# Altium PCB Pocket_Organ_V19_2021-09-19.pcbdoc (part 1 of 3)
Units mil, origin at the board's own origin, x right, y up, seen from the top; angles counter-clockwise.
Board outline 7303.06 x 4993.89 mil, 2 copper layers (Top Layer, Bottom Layer); 194 components, 271 nets, 792 pads, 208 vias.
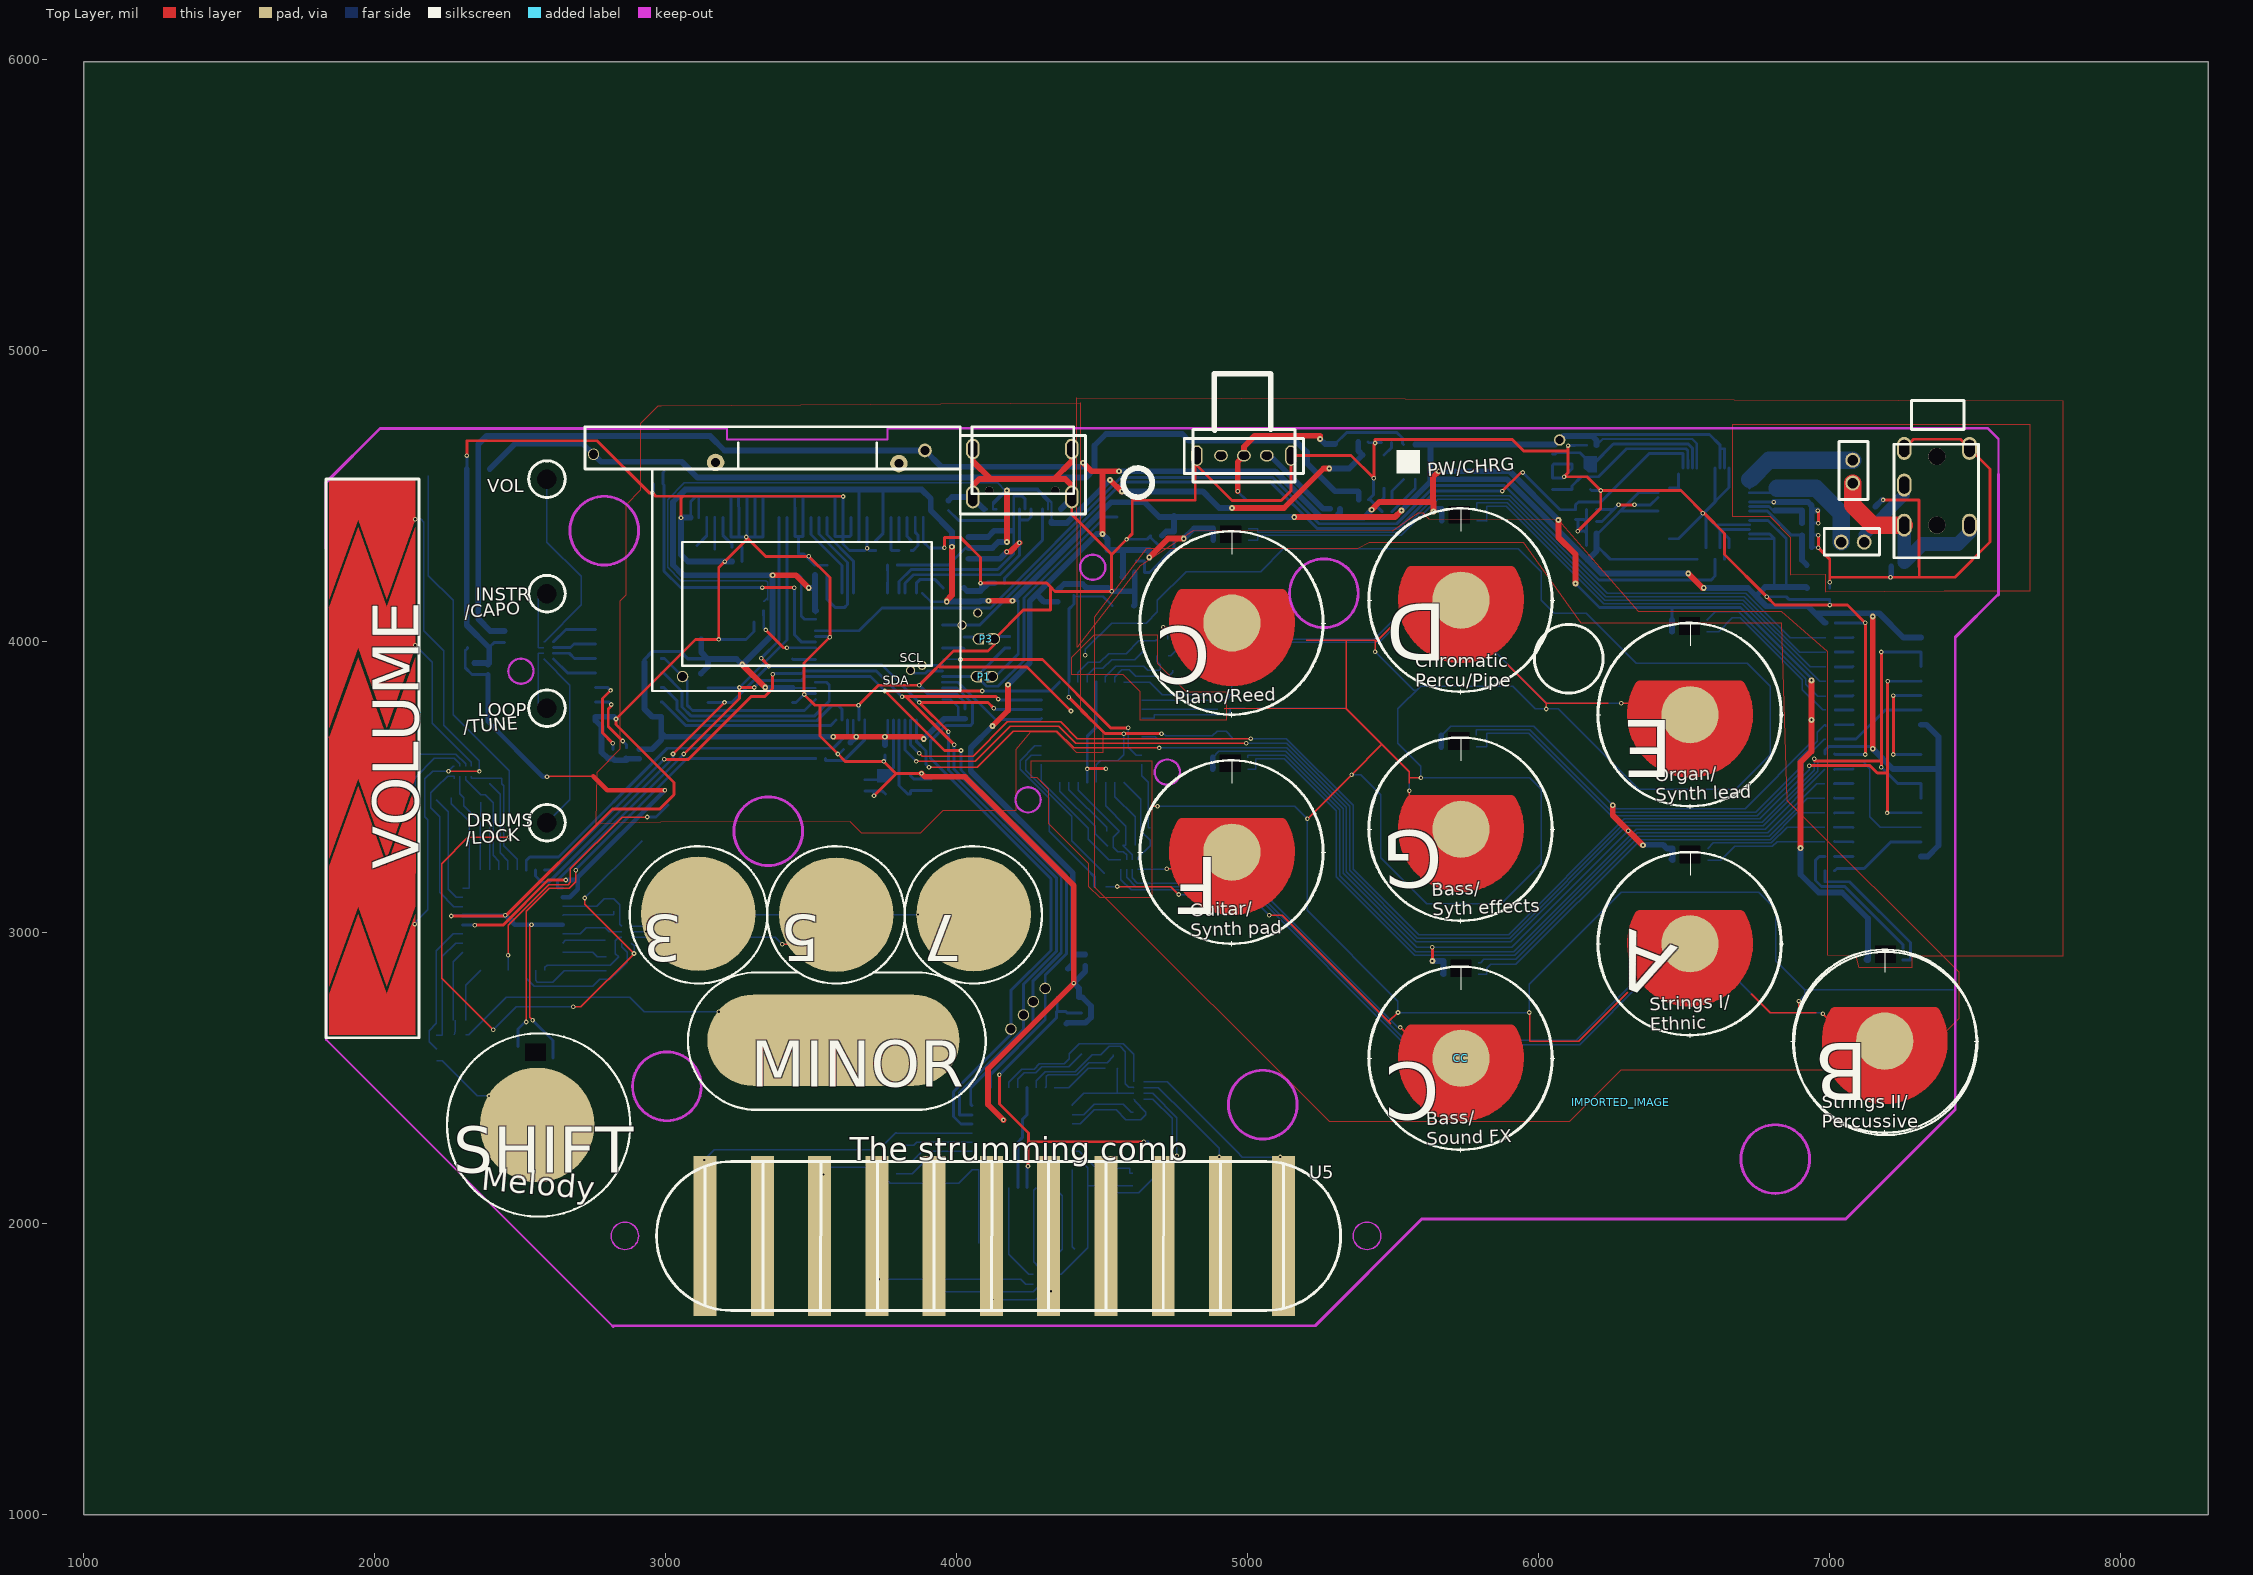
[diagram p0: Top Layer view]
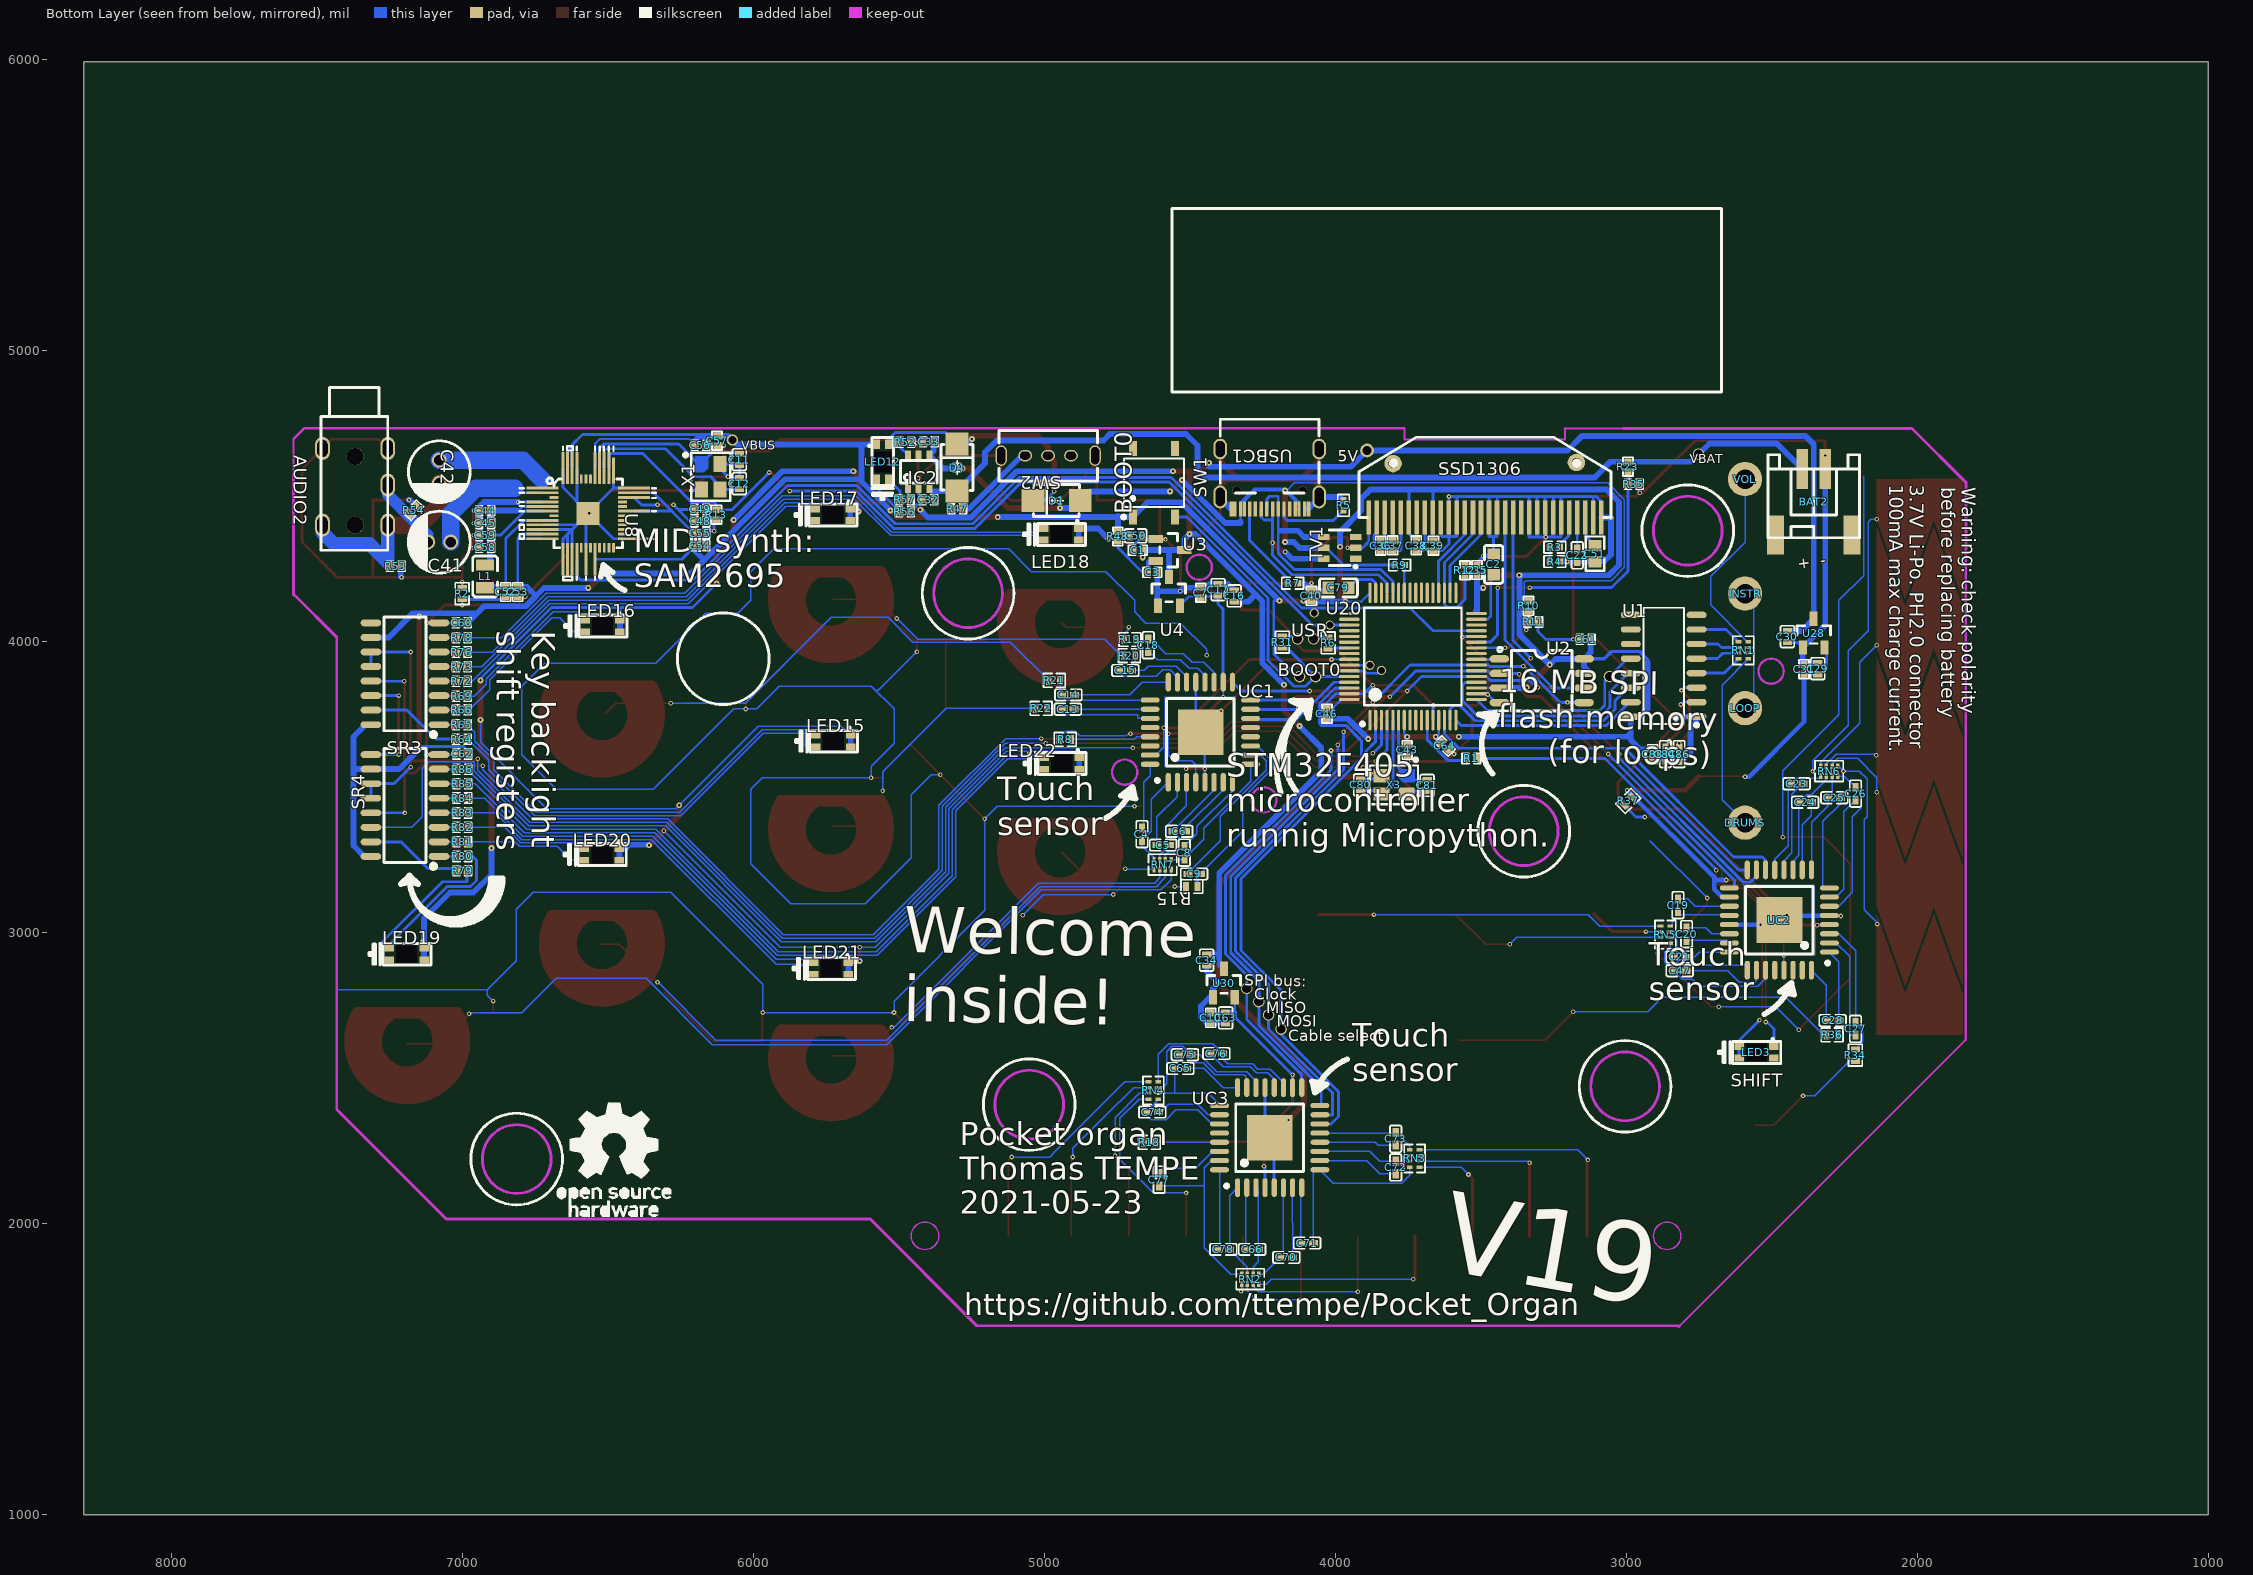
[diagram p1: Bottom Layer view, seen from below]

## Layer stack, top to bottom
Top Layer: signal copper (thickness not stored)
Dielectric: dielectric 12.6, FR-4, Dk 4.8
Bottom Layer: signal copper (thickness not stored)

## Board outline
8303.06,1000 1000,1000 1000,5993.89 8303.06,5993.89

## Components (designator, comment, footprint, x,y, rotation, side; value= is the part's Value field where it differs from the comment)
3 "CAPACITIVE_PAD" CAPACITIVE_PAD_ROUND 3112.2,3065.08 r0 top
5 "CAPACITIVE_PAD" CAPACITIVE_PAD_ROUND 3586.61,3062.22 r0 top
7 "CAPACITIVE_PAD" CAPACITIVE_PAD_ROUND 4059.05,3063.11 r0 top
A "CAPACITIVE_PAD" PAD_11MM_CUT-OFF 6521.65,2961.82 r0 top
AUDIO2 "PJ-313D_C319112" PHONE-JACK-5P-6.0X12.5-H5.0 7370.07,4532.69 r90 bottom
B "CAPACITIVE_PAD" PAD_11MM_CUT-OFF 7190.94,2627.18 r0 top
BAT2 "A2001WR-S-2P" A2001WR-S-2P 2356.29,4480.44 r180 bottom
C "CAPACITIVE_PAD" PAD_11MM_CUT-OFF 4946.84,4064.18 r0 top
C1 "1u" 0402 4679.13,4315.08 r0 bottom
C2 "2.2uF" C0603 3456.69,4265.87 r270 bottom
C3 "1u" 0402 4629.91,4238.31 r180 bottom
C4 "4.7nF" C0402#1 4665.36,3338.47 r90 bottom
C5 "4.7nF" C0402#1 4592.46,3301.07 r0 bottom
C6 "4.7nF" C0402#1 4537.36,3348.37 r180 bottom
C7 "100n" 0402 4463.06,4168.89 r270 bottom
C8 "4.7nF" C0402#1 4519.66,3275.47 r90 bottom
C9 "4.7nF" C0402#1 4486.22,3201.98 r180 bottom
C10 "100n" 0402 4429.13,2706.82 r90 bottom
C11 "20pF" C0402#2 6049.21,4626.11 r270 bottom
C12 "20pF" C0402#2 6049.21,4543.43 r90 bottom
C13 "4.7nF" C0402#1 4920.36,3768.27 r0 bottom
C14 "4.7nF" C0402#1 4918.46,3817.47 r0 bottom
C15 "4.7nF" C0402#1 4722.46,3901.47 r180 bottom
C16 "1uF" C0402#2 4348.42,4157.39 r90 bottom
C17 "1uF" C0402#2 4403.53,4179.05 r90 bottom
C18 "4.7nF" C0402#1 4643.66,3988.07 r90 bottom
C19 "4.7nF" C0402#1 2822.86,3094.37 r90 bottom
C20 "4.7nF" C0402#1 2793.31,2995.29 r90 bottom
C21 "4.7nF" C0402#1 2816.93,2916.55 r0 bottom
C22 "4.7uF" C0402#1 3169.26,4297.17 r270 bottom
C23 "4.7nF" C0402#1 2415.36,3511.77 r180 bottom
C24 "4.7nF" C0402#1 2385.86,3448.07 r180 bottom
C25 "4.7nF" C0402#1 2285.46,3463.77 r180 bottom
C26 "4.7nF" C0402#1 2212.56,3478.27 r270 bottom
C27 "4.7nF" C0402#1 2212.56,2669.17 r270 bottom
C28 "4.7nF" C0402#1 2291.36,2698.27 r0 bottom
C29 "1uF" C0402#2 2342.51,3907.39 r90 bottom
C30 "1uF" C0402#2 2446.84,4017.63 r270 bottom
C31 "100n" 0402 2389.76,3905.42 r90 bottom
C32 "10u" 0402 5399.6,4488.27 r180 bottom
C33 "100n" 0402 5397.63,4687.13 r180 bottom
C34 "1uF" C0402#2 4442.91,2905.64 r270 bottom
C35 "100n" 0402 3513.77,4246.18 r90 bottom
C36 "1u" 0402 3844.48,4330.83 r270 bottom
C37 "1u" 0402 3803.14,4330.83 r90 bottom
C38 "1u" 0402 3722.44,4330.83 r90 bottom
C39 "1u" 0402 3663.38,4330.62 r270 bottom
C40 "100n" 0402 4082.67,4157.6 r90 bottom
C41 "100uF" CAP_5X5.4 7080.7,4342.64 r0 bottom
C42 "100uF" CAP_5X5.4 7080.7,4584.77 r270 bottom
C43 "100n" 0402 3753.93,3628.07 r270 bottom
C44 "100n" 0402 6923.23,4450.91 r180 bottom
C45 "10u" 0402 6923.22,4407.6 r180 bottom
C46 "100n" 0402 4029.52,3752.09 r90 bottom
C47 "4.7nF" C0402#1 2816.93,2869.3 r0 bottom
C48 "4.7u" 0402 6183.06,4413.51 r0 bottom
C49 "100n" 0402 6183.06,4454.84 r0 bottom
C50 "4.7uF" C0402#2 4687,4364.29 r180 bottom
C51 "2.2u" 0603 3108.26,4303.06 r90 bottom
C52 "100n" 0402 6852.35,4171.38 r270 bottom
C53 "100n" 0402 6811.01,4171.38 r270 bottom
C54 "100n" 0402 6183.06,4330.83 r180 bottom
C55 "100n" 0402 6183.06,4372.17 r180 bottom
C56 "10u" 0402 6183.06,4675.32 r180 bottom
C57 "100n" 0402 6125.97,4691.06 r270 bottom
C58 "100n" 0402 6923.22,4324.92 r180 bottom
C59 "10u" 0402 6923.22,4366.26 r180 bottom
C60 "100n" 0402 7003.93,4065.08 r180 bottom
C61 "100n" 0402 3139.76,4007.99 r0 bottom
C62 "100n" 0402 7001.96,3614.3 r180 bottom
C63 "1uF" C0402#2 4377.95,2706.82 r270 bottom
C64 "100n" 0402 3624.01,3641.85 r225 bottom
C65 "4.7nF" C0402#1 4533.46,2533.37 r0 bottom
C66 "4.7nF" C0402#1 4286.46,1911.37 r0 bottom
C70 "4.7nF" C0402#1 4169.26,1883.77 r180 bottom
C71 "4.7nF" C0402#1 4097.46,1933.07 r180 bottom
C72 "4.7nF" C0402#1 3793.26,2192.87 r90 bottom
C73 "4.7nF" C0402#1 3793.26,2291.27 r90 bottom
C74 "4.7nF" C0402#1 4629.92,2383.09 r180 bottom
C75 "4.7nF" C0402#1 4517.66,2580.67 r180 bottom
C76 "4.7nF" C0402#1 4409.46,2584.57 r180 bottom
C77 "4.7nF" C0402#1 4606.29,2150.8 r90 bottom
C78 "4.7nF" C0402#1 4385.86,1911.37 r0 bottom
C79 "2.2uF" C0603 3990.15,4185.16 r0 bottom
C80 "10pF" C0402#2 3913.38,3508 r270 bottom
C81 "10pF" C0402#2 3685.03,3506.03 r270 bottom
C83 "100n" 0402 2909.44,3614.09 r270 bottom
C84 "4.7nF" C0402#1 2866.16,3614.07 r270 bottom
C86 "100pF" C0402#1 2818.86,3614.07 r270 bottom
CC "CAPACITIVE_PAD" PAD_11MM_CUT-OFF 5734.25,2568.12 r0 top
D "CAPACITIVE_PAD" PAD_11MM_CUT-OFF 5734.25,4142.92 r0 top
D1 "SS14" SMA_L4.3-W2.6-LS5.2-FD 4958.66,4485.44 r180 bottom
D4 "SS14" SMA_L4.3-W2.6-LS5.2-FD 5301.17,4598.51 r270 bottom
DRUMS "CAPACITIVE_PAD" T1147-1_PIN 2592.46,3378.07 r0 top
E "CAPACITIVE_PAD" PAD_11MM_CUT-OFF 6521.65,3749.22 r0 top
F "CAPACITIVE_PAD" PAD_11MM_CUT-OFF 4946.84,3276.78 r0 top
G "CAPACITIVE_PAD" PAD_11MM_CUT-OFF 5734.25,3355.52 r0 top
IC2 "TP4057" SOT-23-6 5433.06,4584.73 r0 bottom
IMPORTED_IMAGE "IMPORTED_IMAGE" IMPORTED_IMAGE 6283.06,2416.65 r0 top
INSTR "CAPACITIVE_PAD" T1147-1_PIN 2592.46,4165.47 r0 top
L1 "600Ω" L0805 6923.22,4224.53 r270 bottom
LED3 "SHIFT" LED-SMD_4PIN-L3.2-W1.25-H1.1-TR-TEMPE 2553.06,2588.89 r0 bottom
LED12 "PW/CHRG" LED-SMD_4PIN-L3.2-W1.25-H1.1-TR-TEMPE 5557.08,4618.19 r270 bottom
LED15 "Reverse bicolor LED" LED-SMD_4PIN-L3.2-W1.25-H1.1-TR-TEMPE 5726.37,3658.67 r0 bottom
LED16 "Reverse bicolor LED" LED-SMD_4PIN-L3.2-W1.25-H1.1-TR-TEMPE 6519.68,4054.34 r0 bottom
LED17 "Reverse bicolor LED" LED-SMD_4PIN-L3.2-W1.25-H1.1-TR-TEMPE 5728.34,4436.23 r0 bottom
LED18 "Reverse bicolor LED" LED-SMD_4PIN-L3.2-W1.25-H1.1-TR-TEMPE 4942.91,4369.3 r0 bottom
LED19 "Reverse bicolor LED" LED-SMD_4PIN-L3.2-W1.25-H1.1-TR-TEMPE 7192.9,2926.39 r0 bottom
LED20 "Reverse bicolor LED" LED-SMD_4PIN-L3.2-W1.25-H1.1-TR-TEMPE 6521.64,3268.91 r0 bottom
LED21 "Reverse bicolor LED" LED-SMD_4PIN-L3.2-W1.25-H1.1-TR-TEMPE 5734.24,2877.18 r0 bottom
LED22 "Reverse bicolor LED" LED-SMD_4PIN-L3.2-W1.25-H1.1-TR-TEMPE 4940.94,3581.9 r0 bottom
LOOP "CAPACITIVE_PAD" T1147-1_PIN 2592.46,3771.77 r0 top
MINOR "CAPACITIVE_PAD" CAPACITIVE_PAD_OVAL_22_8 3576.76,2630.04 r0 top
P1 "BOOT0" JUMPER 4098.42,3880.04 r0 bottom
P3 "USR" JUMPER 4100.39,4009.96 r180 bottom
R1 "1k" 0402 3533.06,3598.89 r0 bottom
R2 "0" R0402#1 7001.96,4165.48 r270 bottom
R3 "200K" R0402#2 3246.06,4324.97 r0 bottom
R4 "200K" R0402#2 3246.06,4275.67 r180 bottom
R5 "5.1K" R0402#2 3972.46,4468.67 r270 bottom
R6 "4.7K" R0402#1 4025.58,3995.97 r270 bottom
R7 "5.1K" R0402#2 4147.66,4200.87 r180 bottom
R8 "100K" R0402#1 4929.13,3664.58 r180 bottom
R9 "510" R0402#2 3779.56,4263.67 r0 bottom
R10 "47k" 0402 3336.61,4123.24 r90 bottom
R11 "47k" 0402 3320.86,4068.12 r180 bottom
R12 "47k" 0402 3555.11,4246.18 r270 bottom
R13 "47k" 0402 6127.94,4437.13 r270 bottom
R15 "4.7K" R0402#1 4494.09,3158.67 r180 bottom
R18 "100K" R0402#1 4639.75,2279.44 r180 bottom
R19 "4.7K" R0402#1 4706.68,4007.79 r0 bottom
R20 "4.7K" R0402#1 4708.65,3952.67 r0 bottom
R21 "4.7K" R0402#1 4966.53,3867.33 r0 bottom
R22 "4.7K" R0402#1 5011.81,3770.88 r0 bottom
R23 "47k" 0402 2994.8,4601.77 r90 bottom
R31 "10K" R0402#1 4183.06,3998.89 r270 bottom
R34 "4.7K" R0402#1 2213.06,2578.89 r270 bottom
R35 "47k" 0402 2974.8,4541.77 r180 bottom
R36 "4.7K" R0402#1 2293.06,2648.89 r0 bottom
R37 "100K" R0402#1 2994.09,3452.67 r315 bottom
R47 "1" 0402 5301.17,4456.77 r180 bottom
R48 "1" 0402 4748.02,4362.32 r270 bottom
R52 "10k" 0402 5478.34,4685.16 r0 bottom
R53 "47k" 0402 7230.31,4259.07 r180 bottom
R54 "47k" 0402 7169.28,4451.98 r132 bottom
R56 "220" 0402 5480.3,4446.93 r0 bottom
R57 "2k" 0402 5480.3,4488.27 r0 bottom
R64 "220" 0402 7003.93,3665.48 r180 bottom
R65 "220" 0402 7003.93,3714.69 r180 bottom
R66 "220" 0402 7003.92,3765.87 r180 bottom
R69 "220" 0402 7003.93,3813.11 r180 bottom
R72 "220" 0402 7003.92,3864.29 r180 bottom
R73 "220" 0402 7003.93,3913.51 r180 bottom
R76 "220" 0402 7003.93,3964.69 r180 bottom
R78 "220" 0402 7003.92,4013.9 r180 bottom
R79 "220" 0402 7001.95,3212.72 r180 bottom
R80 "220" 0402 7001.95,3261.93 r180 bottom
R81 "220" 0402 7001.95,3313.12 r180 bottom
R82 "220" 0402 7001.95,3362.33 r180 bottom
R83 "220" 0402 7001.95,3411.54 r180 bottom
R84 "220" 0402 7001.95,3462.72 r180 bottom
R85 "220" 0402 7001.95,3511.93 r180 bottom
R86 "220" 0402 7001.95,3561.15 r180 bottom
RN1 "1K" RES-ARRAY-SMD_0402-8P-L2.0-W1.0-BL 2598.46,3970.37 r90 bottom
RN2 "10k" RES-ARRAY-SMD_0402-8P-L2.0-W1.0-BL 4293.06,1808.87 r180 bottom
RN3 "10k" RES-ARRAY-SMD_0402-8P-L2.0-W1.0-BL 3728.16,2223.77 r90 bottom
RN4 "10k" RES-ARRAY-SMD_0402-8P-L2.0-W1.0-BL 4626.36,2457.67 r270 bottom
RN5 "10k" RES-ARRAY-SMD_0402-8P-L2.0-W1.0-BL 2866.14,2993.32 r90 bottom
RN6 "10k" RES-ARRAY-SMD_0402-8P-L2.0-W1.0-BL 2303.16,3555.07 r0 bottom
RN7 "10k" RES-ARRAY-SMD_0402-8P-L2.0-W1.0-BL 4594.46,3234.17 r180 bottom
SHIFT "CAPACITIVE_PAD" CAPACITIVE_PAD_ROUND 2559,2338.85 r0 top
SR3 "74HC595A" SOIC-16_150MIL 7198.81,3889.89 r270 bottom
SR4 "74HC595A" SOIC-16_150MIL 7198.81,3437.13 r270 bottom
SSD1306 "SSD1306-128x64-OLED-SPI" "SSD1306-30PIN-POT REVERSED" 3486.26,4427.27 r0 bottom
SW1 "TS-1187A-B-A-B" SW-SMD_4P-L5.1-W5.1-P3.70-LS6.5-2 4624.01,4546.47 r270 bottom
SW2 "SK-12D02-VG3" SW-TH_SK-12D02VG3 4988.15,4639.87 r180 bottom
TV1 "SRV05-4-P-T7" SOT-23-6_L2.9-W1.6-P0.95-LS2.8-BR 3986.17,4322.76 r0 bottom
U1 "XW06A" SOP-16_L10.0-W3.9-P1.27-LS6.0-BL 2872.06,3917.27 r270 bottom
U2 "W25Q128JVSIQTR" SOIC-8_L5.3-W5.3-P1.27-LS8.0-BL 3291.33,3866.05 r90 bottom
U3 "XC6206P332MR" SOT-23-3_L2.9-W1.6-P1.90-LS2.8-BR 4568.89,4315.08 r180 bottom
U4 "XC6206P332MR" SOT-23-3_L2.9-W1.6-P1.90-LS2.8-BR 4572.83,4173.35 r90 bottom
U5 "Strumming_comb_11" STRUMMING_COMB_11 3943.06,1858.89 r0 top
U8 "SAM2695" QFN48G-0.4-6X6MM 6568.89,4441.06 r90 bottom
U20 "STM32F405RGT6" LQFP-64_L10.0-W10.0-P0.50-LS12.0-TL 3734.07,3949.38 r270 bottom
U28 "XC6206P332MR" SOT-23-3_L2.9-W1.6-P1.90-LS2.8-BR 2356.29,4029.44 r90 bottom
U30 "XC6206P332MR" SOT-23-3_L2.9-W1.6-P1.90-LS2.8-BR 4383.85,2826.89 r90 bottom
UC1 "AT42QT1110-AUR" TQFP-32_L7.0-W7.0-P0.80-LS9.0-BL 4464.56,3689.07 r0 bottom
UC2 "AT42QT1110-AUR" TQFP-32_L7.0-W7.0-P0.80-LS9.0-BL 2474.36,3043.47 r270 bottom
UC3 "AT42QT1110-AUR" TQFP-32_L7.0-W7.0-P0.80-LS9.0-BL 4226.36,2295.37 r0 bottom
USBC1 "TYPE-C-31-M-12" USB-C_SMD-TYPE-C-31-M-12 4226.37,4559.18 r180 bottom
VOL "CAPACITIVE_PAD" T1147-1_PIN 2592.46,4559.17 r0 top
VOLUME "Slide Key 4 pads" SLIDER_4 2139.76,3673.37 r90 top
X1 "12MHz" OSC-SMD_4P-L3.2-W2.5-BL 6147.64,4567.05 r90 bottom
X3 "12MHz" OSC-SMD_4P-L3.2-W2.5-BL 3799.2,3508 r180 bottom

## Footprints (in the part's own frame and the unit in brackets; to place one, negate y for a bottom-side part, rotate by r counter-clockwise, add the part's x,y. Pads: shape width x height; smd on the part's side, far side on the other; paste and mask are expansions set on the pad)
0402 [mm]
  rect 0.6x0.65 smd: 1(0.424,0) 2(-0.424,0)
  silkscreen extent -0.81,-0.43 0.82,0.43
0603 [mm]
  rect 1x1.1 smd: 1(0.7,0) 2(-0.7,0)
  silkscreen extent -1.5,-0.8 1.5,0.8
A2001WR-S-2P [mm]
  rect 1x3.5 smd: 1(-1,2.875) 2(1,2.875)
  rect 1.5x3.4 smd: 4(-3.349,-2.875) 5(3.349,-2.875)
  silkscreen extent -4,-3.13 4,4.12
C0402#1 [mm]
  rect 0.79x0.54 smd: 1(0.545,0) 2(-0.545,0)
  silkscreen extent -1.17,-0.5 1.17,0.5
C0402#2 [mm]
  rect 0.5x0.8 smd: 1(0.5,0) 2(-0.5,0)
  silkscreen extent -0.95,-0.6 0.95,0.6
C0603 [mm]
  rect 1x1.1 smd: 1(0.9,0) 2(-0.9,0)
  silkscreen extent -1.65,-0.8 1.65,0.8
CAP_5X5.4 [mm]
  round 1.3 hole 0.914: 1(-1,0) 2(1,0)
  silkscreen extent -2.7,-2.7 2.7,2.7
CAPACITIVE_PAD_OVAL_22_8 [mm]
  oval 22x8 smd: 1(0,0)
CAPACITIVE_PAD_ROUND [mm]
  round 10 smd: 1(0,0)
IMPORTED_IMAGE [mil]
JUMPER [mm]
  rect 0.5x1 smd far side: 1(0.381,0) 2(-0.508,0)
  round 1 hole 0.8: 1(0.635,0) 2(-0.762,0)
L0805 [mm]
  rect 1x1.55 smd: 1(1,0) 2(-1,0)
  silkscreen extent -1.78,-1.08 1.78,1.08
LED-SMD_4PIN-L3.2-W1.25-H1.1-TR-TEMPE [mil]
  rect 32.68x23.62 smd: 1(-60,-20) 2(60,-20) 3(-60,20) 4(60,20)
  Multi-Layer board cut-out: 35.43,-29.53 35.43,29.53 -35.43,29.53 -35.43,-29.53
  silkscreen extent -84,-48 130,38
LQFP-64_L10.0-W10.0-P0.50-LS12.0-TL [mm]
  oval 1.8x0.28 smd: 1(5.55,-3.75) 2(5.55,-3.25) 3(5.55,-2.75) 4(5.55,-2.25) 5(5.55,-1.75) 6(5.55,-1.25) 7(5.55,-0.75) 8(5.55,-0.25) 9(5.55,0.25) 10(5.55,0.75) 11(5.55,1.25) 12(5.55,1.75) 13(5.55,2.25) 14(5.55,2.75) 15(5.55,3.25) 16(5.55,3.75) 33(-5.55,3.75) 34(-5.55,3.25) 35(-5.55,2.75) 36(-5.55,2.25) 37(-5.55,1.75) 38(-5.55,1.25) 39(-5.55,0.75) 40(-5.55,0.25) 41(-5.55,-0.25) 42(-5.55,-0.75) 43(-5.55,-1.25) 44(-5.55,-1.75) 45(-5.55,-2.25) 46(-5.55,-2.75) 47(-5.55,-3.25) 48(-5.55,-3.75)
  oval 0.28x1.8 smd: 17(3.75,5.55) 18(3.25,5.55) 19(2.75,5.55) 20(2.25,5.55) 21(1.75,5.55) 22(1.25,5.55) 23(0.75,5.55) 24(0.25,5.55) 25(-0.25,5.55) 26(-0.75,5.55) 27(-1.25,5.55) 28(-1.75,5.55) 29(-2.25,5.55) 30(-2.75,5.55) 31(-3.25,5.55) 32(-3.75,5.55) 49(-3.75,-5.55) 50(-3.25,-5.55) 51(-2.75,-5.55) 52(-2.25,-5.55) 53(-1.75,-5.55) 54(-1.25,-5.55) 55(-0.75,-5.55) 56(-0.25,-5.55) 57(0.25,-5.55) 58(0.75,-5.55) 59(1.25,-5.55) 60(1.75,-5.55) 61(2.25,-5.55) 62(2.75,-5.55) 63(3.25,-5.55) 64(3.75,-5.55)
  silkscreen extent -4.25,-4.55 6.05,4.25
OSC-SMD_4P-L3.2-W2.5-BL [mm]
  round 0 smd: 1(1.1,0.8)
  rect 1.4x1.15 smd: 2(-1.1,0.8) 3(-1.1,-0.8) 4(1.1,-0.8)
  Top Layer region: 1.8,0.225 0.762,0.225 0.4,0.604 0.4,1.375 1.8,1.375
  silkscreen extent -2.1,-1.7 2.1,2.35
PAD_11MM_CUT-OFF [mm]
  round 5 smd: 1(0,0)
  Top Layer lines w1: -3.523,2.416 ccw(c0,0) 3.594,2.309 ; -2.654,2.229 ccw(c0,0) 2.562,2.334 ; -1.116,2.47 ccw(c0,0) 1.589,2.196 ; -4.347,2.47 4.347,2.47 cw(c0,0) -4.347,2.47
  silkscreen extent -8.2,-8.2 8.2,8
PHONE-JACK-5P-6.0X12.5-H5.0 [mm]
  oval 2x1.3 hole 0.9 slot 1.5 at 0 deg: 1(3.35,-2.85) 1(3.35,2.85) 2(0.15,-2.85) 3(-3.35,-2.85) 3(-3.35,2.85)
  round 1.5 hole 1.5 unplated: ""(-3.35,0) ""(2.65,0)
  silkscreen extent -5.54,-2.85 8.68,2.99
QFN48G-0.4-6X6MM [mil]
  rect 10x110.24 smd: 1(87,157.48) 2(71,157.48) 4(39,157.48) 5(24,157.48) 6(8,157.48) 8(-24,157.48) 9(-39,157.48) 10(-55,157.48) 11(-71,157.48) 12(-87,157.48) 25(-87,-157.36) 31(8,-157.36) 34(55,-157.36) 35(71,-157.36) 36(87,-157.36)
  rect 9.84x31.5 smd: 3(55,118) 7(-8,118) 26(-71,-118) 27(-55,-118) 28(-39,-118) 29(-24,-118) 30(-8,-118) 32(24,-118) 33(39,-118)
  rect 110.24x10 smd: 13(-157.48,87) 14(-157.48,71) 15(-157.48,55) 16(-157.48,39) 18(-157.48,8) 20(-157.48,-24) 38(155.51,-71) 39(155.51,-55) 40(155.51,-39) 41(155.51,-24) 45(155.51,39) 46(155.51,55) 47(155.51,71) 48(155.51,87)
  rect 31.5x9.84 smd: 17(-118,24) 19(-118,-8) 21(-118,-39) 22(-118,-55) 23(-118,-71) 24(-118,-87) 42(118,-8) 43(118,8) 44(118,24)
  rect 90.55x10 smd: 37(147.64,-87)
  rect 78.74x78.74 smd: PAD(0,0)
  silkscreen extent -118,-118 122,142
R0402#1 [mm]
  rect 0.5x0.8 smd: 1(0.5,0) 2(-0.5,0)
  silkscreen extent -0.95,-0.6 0.95,0.6
R0402#2 [mm]
  rect 0.566x0.54 smd: 1(0.433,0) 2(-0.433,0)
  silkscreen extent -0.94,-0.5 0.94,0.5
RES-ARRAY-SMD_0402-8P-L2.0-W1.0-BL [mm]
  rect 0.3x0.505 smd: 1(0.75,-0.427) 2(0.25,-0.427) 3(-0.25,-0.427) 4(-0.75,-0.427) 5(-0.75,0.428) 6(-0.25,0.428) 7(0.25,0.428) 8(0.75,0.428)
  silkscreen extent -1.23,-0.91 1.23,0.91
SLIDER_4 [mm]
  round 0 smd: 1(-26,0) 1(22.5,7.5) 2(-11.3,7.5) 3(-0.1,7.5) 4(11.3,7.5)
  Top Layer region: -26,0 -15.5,0 -22.5,2.5 -15.5,5 -22.5,7.5 -26,7.5
  Top Layer region: 22.5,7.5 12,7.5 19,5 12,2.5 19,0 22.5,0
  Top Layer region: -11.3,7.5 -21.8,7.5 -14.8,5 -21.8,2.5 -14.8,0 -4.3,0 -11.3,2.5 -4.3,5
  Top Layer region: -0.1,7.5 -10.6,7.5 -3.6,5 -10.6,2.5 -3.6,0 6.9,0 -0.1,2.5 6.9,5
  Top Layer region: 11.3,7.5 0.8,7.5 7.8,5 0.8,2.5 7.8,0 18.3,0 11.3,2.5 18.3,5
SMA_L4.3-W2.6-LS5.2-FD [mm]
  rect 2x2 smd: 1(2.057,0) 2(-2.057,0)
  silkscreen extent -2.03,-1.4 2.01,1.4
SOIC-8_L5.3-W5.3-P1.27-LS8.0-BL [mm]
  oval 0.65x1.7 smd: 1(1.905,3.7) 2(0.635,3.7) 3(-0.635,3.7) 4(-1.905,3.7) 5(-1.905,-3.7) 6(-0.635,-3.7) 7(0.635,-3.7) 8(1.905,-3.7)
  silkscreen extent -2.63,-2.64 2.92,3.84
SOIC-16_150MIL [mm]
  oval 0.6x1.8 smd: 1(4.445,2.972) 2(3.175,2.972) 3(1.905,2.972) 4(0.635,2.972) 5(-0.635,2.972) 6(-1.905,2.972) 7(-3.175,2.972) 8(-4.445,2.972) 9(-4.445,-2.972) 10(-3.175,-2.972) 11(-1.905,-2.972) 12(-0.635,-2.972) 13(0.635,-2.972) 14(1.905,-2.972) 15(3.175,-2.972) 16(4.445,-2.972)
  silkscreen extent -4.98,-1.83 5.51,2.69
SOP-16_L10.0-W3.9-P1.27-LS6.0-BL [mm]
  oval 0.56x1.745 smd: 1(4.445,2.873) 2(3.175,2.873) 3(1.905,2.873) 4(0.635,2.873) 5(-0.635,2.873) 6(-1.905,2.873) 7(-3.175,2.873) 8(-4.445,2.873) 9(-4.445,-2.873) 10(-3.175,-2.873) 11(-1.905,-2.873) 12(-0.635,-2.873) 13(0.635,-2.873) 14(1.905,-2.873) 15(3.175,-2.873) 16(4.445,-2.873)
  silkscreen extent -5.08,-1.77 5.33,3.02
SOT-23-3_L2.9-W1.6-P1.90-LS2.8-BR [mm]
  rect 1.25x0.7 smd: 1(-1.25,0.95) 2(-1.25,-0.95) 3(1.25,0)
  silkscreen extent -0.9,-1.46 0.65,1.46
SOT-23-6 [mil]
  rect 20.1x31.5 smd: 1(37,57) 2(0,57) 3(-37,57) 4(-37,-57) 5(0,-57) 6(37,-57)
  silkscreen extent -63,-39 63,39
SOT-23-6_L2.9-W1.6-P0.95-LS2.8-BR [mm]
  rect 1x0.55 smd: 1(-1.4,0.95) 2(-1.4,0) 3(-1.4,-0.95) 4(1.4,-0.95) 5(1.4,0) 6(1.4,0.95)
  silkscreen extent -1.52,-1.55 0.9,1.78
"SSD1306-30PIN-POT REVERSED" [mm]
  rect 0.4x3 smd: 1(10.15,0) 2(9.45,0) 3(8.75,0) 4(8.05,0) 5(7.35,0) 6(6.65,0) 7(5.95,0) 8(5.25,0) 9(4.55,0) 10(3.85,0) 11(3.15,0) 12(2.45,0) 13(1.75,0) 14(1.05,0) 15(0.35,0) 16(-0.35,0) 17(-1.05,0) 18(-1.75,0) 19(-2.45,0) 20(-3.15,0) 21(-3.85,0) 22(-4.55,0) 23(-5.25,0) 24(-5.95,0) 25(-6.65,0) 26(-7.35,0) 27(-8.05,0) 28(-8.75,0) 29(-9.45,0) 30(-10.15,0)
  silkscreen extent -11,-7 11,0
STRUMMING_COMB_11 [mm]
  rect 2x14 smd: 1(-20.5,2.5) 2(-15.5,2.5) 3(-10.5,2.5) 4(-5.5,2.5) 5(-0.5,2.5) 6(4.5,2.5) 7(9.5,2.5) 8(14.5,2.5) 9(19.5,2.5) 10(24.5,2.5) 11(30,2.5)
  silkscreen extent -24.74,-4 34.99,9
SW-SMD_4P-L5.1-W5.1-P3.70-LS6.5-2 [mm]
  rect 1.281x0.7 smd: 1(2.99,-1.85) 2(-2.99,-1.85) 3(2.99,1.85) 4(-2.99,1.85)
  silkscreen extent -2.12,-2.8 3.14,2.63
SW-TH_SK-12D02VG3 [mm]
  oval 1.2x1 hole 0.7 slot 0.9 at 0 deg: 1(2,0) 2(0,0) 3(-2,0)
  oval 1x1.8 hole 0.7 slot 1.5 at 90 deg: 4(-4.1,0) 5(4.1,0)
  silkscreen extent -4.3,-2.2 4.3,2.2
T1147-1_PIN [mm]
  round 3 smd far side: 1(0,0)
  round 1.55 hole 1.7: 1(0,0)
  silkscreen extent -1.6,-1.6 1.6,1.6
TQFP-32_L7.0-W7.0-P0.80-LS9.0-BL [mm]
  oval 0.45x1.65 smd: 1(2.8,4.369) 2(2,4.369) 3(1.2,4.369) 4(0.4,4.369) 5(-0.4,4.369) 6(-1.2,4.369) 7(-2,4.369) 8(-2.8,4.369) 17(-2.8,-4.369) 18(-2,-4.369) 19(-1.2,-4.369) 20(-0.4,-4.369) 21(0.4,-4.369) 22(1.2,-4.369) 23(2,-4.369) 24(2.8,-4.369)
  oval 1.65x0.45 smd: 9(-4.381,2.8) 10(-4.381,2) 11(-4.381,1.2) 12(-4.381,0.4) 13(-4.381,-0.4) 14(-4.381,-1.2) 15(-4.381,-2) 16(-4.381,-2.8) 25(4.381,-2.8) 26(4.381,-2) 27(4.381,-1.2) 28(4.381,-0.4) 29(4.381,0.4) 30(4.381,1.2) 31(4.381,2) 32(4.381,2.8)
  silkscreen extent -2.94,-2.95 3.91,4.36
USB-C_SMD-TYPE-C-31-M-12 [mm]
  oval 1.2x2 hole 0.8 slot 1.6 at 90 deg: 0(-4.32,-1.556) 0(4.32,-1.556)
  oval 1.2x1.8 hole 0.8 slot 1.4 at 90 deg: 0(-4.32,2.624) 0(4.32,2.624)
  rect 0.3x1.3 smd: A1(3.4,-2.624) A4(2.56,-2.624) A5(1.25,-2.624) A6(0.25,-2.624) A7(-0.25,-2.624) A8(-1.25,-2.624) A9(-2.55,-2.624) A12(-3.35,-2.624) B1(-3.05,-2.624) B4(-2.24,-2.624) B5(-1.75,-2.624) B6(-0.75,-2.624) B7(0.75,-2.624) B8(1.75,-2.624) B9(2.24,-2.624) B12(3.05,-2.624)
  round 0.75 hole 0.75 unplated: ""(-2.89,-1.026) ""(2.89,-1.026)
  silkscreen extent -4.32,-1.22 4.32,5.23

## Free pads (board coordinates)
  round 60 hole 31.5: 3(3172.15,4616.27) 3(3802.07,4612.32)
  rect 157.48x157.48 smd far side: 4(2474.4,3043.43) 4(4226.37,2295.4) 4(4463.06,3688.89)
  rect 0.39x0.39 smd far side: 7(5301.17,4679.5)
  round 47.24 hole 31.5: 12(3891.73,4657.6)
  round 39.37 hole 31.5: 13(2752.31,4644.26) 20(4305.11,2808.28) 21(4263.78,2763.01) 22(4230.26,2717) 23(4187,2668.52) 26(3058.59,3880.45)
  round 31.5 hole 23.62: 31(4019.68,4057) 32(4073.06,4098.89) 33(3881.88,3919.2) 34(3842.51,3901.49)
  round 39.37 hole 27.56: 39(6073.43,4693.63)

## Via types
v1: diameter 15.75, hole 7.87, Top Layer to Bottom Layer, 165 vias
v2: diameter 20, hole 7.87, Top Layer to Bottom Layer, 43 vias

## Nets (pads, with @x,y where several pads share a name; then routed paths per layer and width w, separated by ;. In a path a pad name is that pad's centre, name@x,y a point inside that pad or via, vN(x,y) a via of type N, cw(c..) or ccw(c..) an arc to the next point about the centre after c; other vN are vias at no path point)
3V3_TOUCH1: C7.1 C17.2 R8.2 U4.2 UC1.4 UC1.18 | length 1387.8
  Top Layer w10: v1@4385.86,3809.17 4510.76,3684.27 v1@4704.76,3684.27
  Bottom Layer w5: v1(4385.82,3809.18) 4385.82,3860.75 UC1.18@4386.17,3861.09 ; UC1.4@4480.31,3517.07 4480.31,3577.97 4494.09,3591.74 4555.11,3591.74 4574.8,3611.43 v1(4574.8,3684.26) ; v1(4704.72,3684.26) 4710.85,3684.26 4718.72,3676.39 4879.91,3676.39 4895.66,3692.14 4927.16,3692.14 4948.81,3670.49 R8.2@4948.81,3664.58
  Bottom Layer w7.87: C17.2@4403.56,4159.37 4403.56,4155.47 4504.16,4155.47 U4.2@4535.46,4124.17
  Bottom Layer w10: UC1.18@4386.16,3861.07 4386.16,4111.97 4403.56,4129.37 C17.2@4403.56,4159.37
3V3_TOUCH2: C29.2 C31.2 R37.2 U28.2 UC2.4 UC2.18 | length 2025
  Top Layer w5: v1@2592.51,3535.77 2594.48,3537.52 2751.97,3537.52
  Top Layer w10: v1(2344.48,3025.71) 2441.14,3025.71 2596.45,3181.02 v1(2657.47,3181.02)
  Top Layer w15.75: 2751.97,3537.52 2799.42,3490.07 v1(2998.02,3490.07)
  Bottom Layer w10: UC2.4@2302.41,3027.03 2343.17,3027.03 v1(2344.48,3025.71) ; U28.2@2318.86,3980.27 2318.86,3976.97 2311.46,3969.57 2311.46,3910.47 2334.26,3887.67 C29.2@2342.56,3887.67 ; C29.2@2342.52,3887.71 2388.75,3887.7 C31.2@2389.76,3888.72
  Bottom Layer w15.75: C31.2@2389.76,3888.72 2389.76,3724.37 2578.56,3535.57 v1(2592.51,3535.55) ; UC2.18@2646.36,3121.87 2670.95,3121.87 2698.82,3149.73 2698.82,3190.86 v1(2998.02,3490.07) ; v1(2657.47,3181.02) 2690.95,3181.02 2698.82,3188.89
3V3_TOUCH3: C10.1 C63.2 R18.2 U30.2 UC3.4 UC3.18 | length 1330.7
  Top Layer w10: v1@4147.66,2511.97 4147.66,2411.57 4248.06,2311.17 4248.06,2279.67 ; v1(4246.05,2196.97) 4246.07,2277.67 4248.06,2279.67 ; v1(4643.69,2281.41) 4251.62,2281.41 4248.06,2284.97 4248.06,2279.67
  Bottom Layer w10: UC3.18@4147.96,2467.37 4147.66,2511.97 4344.48,2708.78 4344.48,2728.47 ; UC3.4@4242.77,2123.4 4242.77,2193.69 v1(4246.05,2196.97) ; U30.2@4346.45,2777.69 4346.45,2730.44 4344.48,2728.47 ; C10.1@4429.13,2723.52 4380.93,2723.51 C63.2@4377.94,2726.5 4375.97,2728.47 4344.48,2728.47 ; v1(4643.69,2281.41) 4657.48,2281.41 R18.2@4659.43,2279.44
  other v1: 4147.63,2511.93
+5V: C1.2 C16.2 C30.2 C34.2 LED15.1 LED15.3 LED16.1 LED16.3 LED17.1 LED17.3 LED18.1 LED18.3 LED19.1 LED19.3 LED20.1 LED20.3 LED21.1 LED21.3 LED22.1 LED22.3 pad.12 R47.2 U3.3 U4.3 U28.3 U30.3 | length 14272.9
  Top Layer w10: v2(5635.82,2902.77) v1(5635.82,2950.01)
  Top Layer w20: v2(4124.01,3710.75) 4177.15,3763.89 v2(4177.15,3852.27) ; v2(4435.03,4615.36) 4464.55,4585.84 v2(4559.05,4585.84) ; v2(4501.96,4370.2) 4501.96,4585.84 ; v2(4662.43,4290.02) 4726.86,4354.45 v2(4781.48,4354.45) ; v2(5427.15,4453.95) 5453.64,4480.44 5639.75,4480.44 v2(5639.75,4448.04) ; 5637.77,4480.47 5637.77,4566.13 v2(5657.47,4585.84) ; v2(6068.89,4418.51) 6068.89,4359.46 6127.94,4300.41 v2(6127.94,4200.01) ; v2(6255.89,3438.2) 6255.89,3403.67 v1(6309.04,3350.52) 6359.16,3300.41 v2(6360.22,3300.41) ; v2(6901.56,3290.56) 6901.56,3585.84 6938.97,3623.24 v2(6938.96,3731.51) v2(6938.96,3867.33)
  Bottom Layer w5: LED22.1@4880.96,3601.87 4902.26,3623.27 5131.86,3623.27 5328.76,3426.37 5328.76,3203.87 5582.66,2949.97 5908.46,2949.97 v1@6309.06,3350.57 ; LED15.1@5666.37,3678.67 5666.37,3676.38 5699.85,3709.85 5984.25,3709.85 6267.71,3426.39 6710.62,3426.39 6938.96,3654.73 v2(6938.96,3731.51)
  Bottom Layer w10.08: v2(6127.94,4200.01) 6210.62,4117.33 6459.67,4117.33 LED16.1@6459.68,4074.34 ; 6448.81,4117.34 6694.86,4117.37 6938.96,3873.27 v2@6938.96,3867.37
  Bottom Layer w20: 2356.26,4145.67 2356.26,4678.97 2384.06,4706.77 3153.57,4706.77 3202.77,4657.57 3891.76,4657.57 3947.76,4601.57 4435.06,4601.57 v2@4435.06,4615.37 ; 2356.29,4145.64 U28.3@2356.29,4078.64 2397.62,4037.31 C30.2@2446.84,4037.31 ; v2(4124.01,3710.75) 4049.21,3635.94 4049.21,3555.24 4399.56,3204.88 4399.56,2925.37 ; v2(4177.15,3852.27) 4251.96,3927.08 4251.96,4139.88 4482.28,4370.2 v2(4501.96,4370.2) 4519.69,4352.48 U3.3@4519.69,4315.08 C1.2@4662.43,4315.08 v2(4662.43,4290.02) ; 4275.09,4163.01 4300.39,4137.71 C16.2@4348.42,4137.71 ; U30.3@4383.85,2876.09 4399.56,2891.87 4399.56,2925.37 ; C34.2@4442.86,2925.37 4399.56,2925.37 ; v2(4559.05,4585.84) 5095.4,4585.84 5253.96,4427.27 5301.16,4427.27 5317.86,4443.97 R47.2@5317.87,4456.77 ; U4.3@4570.87,4222.57 U4.3@4572.86,4222.57 ; U4.3@4572.83,4222.55 4572.82,4315.08 ; v2@4781.49,4354.45 4816.35,4389.31 LED18.1@4882.91,4389.3 LED18.3@4882.91,4349.3 LED18.3@4882.9,4354.76 ; LED22.1@4880.94,3601.9 LED22.3@4880.94,3561.9 4880.93,3565.4 LED22.3@4882.9,3567.37 ; 5301.17,4427.29 5400.49,4427.29 v2(5427.15,4453.95) ; v2@5635.86,2902.77 5674.26,2902.77 LED21.1@5674.26,2897.17 ; v2(5639.75,4448.04) 5647.95,4456.23 LED17.1@5668.34,4456.23 LED17.3@5668.34,4416.23 ; v2(5657.47,4585.84) 5901.57,4585.84 v2(6068.89,4418.51) ; LED15.3@5666.37,3638.67 LED15.1@5666.37,3678.67 ; LED21.3@5672.27,2858.71 5673.8,2857.18 LED21.3@5674.24,2857.18 LED21.1@5674.24,2897.18 ; v2(6360.22,3300.41) 6362.2,3302.38 6429.13,3302.38 6442.59,3288.91 LED20.1@6461.64,3288.91 LED20.3@6461.64,3248.91 6461.2,3248.91 LED20.3@6457.71,3252.4 ; LED16.3@6459.68,4034.34 LED16.1@6459.68,4074.34 ; v2(6901.56,3290.56) 6901.56,3200.39 6964.25,3137.71 7044.25,3137.71 7132.9,3049.05 LED19.1@7132.9,2946.39 LED19.3@7132.9,2906.39 7129.59,2906.39 LED19.3@7128.17,2907.82
AUDIO2_2: AUDIO2.2 C41.2 R54.2 | length 253
  Bottom Layer w39.37: C41.2@7120.06,4342.67 7120.06,4367.37 7257.86,4505.17 AUDIO2.2@7257.86,4538.59
AUDIO2_3: AUDIO2.3 C42.2 R53.2 | length 701.7
  Top Layer w59.05: C42.2@7080.7,4545.4 7080.66,4469.67 7149.56,4400.77 AUDIO2.3@7257.86,4400.8
  Bottom Layer w47.24: AUDIO2.3@7257.86,4400.8 7257.86,4272.87 7320.86,4335.87 7442.86,4335.87 7482.26,4375.17 AUDIO2.3@7482.27,4400.8
BOOT0: P1.2 R31.1 SW1.3 U20.60 | length 1134.9
  Bottom Layer w10: U20.60@3952.57,3880.48 4068.01,3880.47 P1.2@4068.42,3880.04 4167.58,3979.2 R31.1@4183.06,3979.2 ; P1.2@4068.42,3880.04 4069.96,3880.04 4103.06,3846.94 4143.06,3846.94 4231.9,3935.77 4231.9,4150.41 4510.21,4428.73 SW1.3@4551.18,4428.73
C36_1: C36.1 SSD1306.2 | length 131
  Bottom Layer w10: C36.1@3844.48,4314.13 3851.36,4314.07 3868.06,4330.87 3868.06,4366.27 3858.26,4376.07 SSD1306.2@3858.31,4427.27
C36_2: C36.2 SSD1306.3 | length 85.5
  Bottom Layer w10: SSD1306.3@3830.74,4427.27 3830.71,4361.3 C36.2@3844.48,4347.53
C37_1: C37.1 SSD1306.4 | length 79.8
  Bottom Layer w10: C37.1@3803.14,4347.53 SSD1306.4@3803.14,4427.28
C37_2: C37.2 SSD1306.5 | length 140.2
  Bottom Layer w10: SSD1306.5@3775.63,4427.27 3775.58,4315.08 3776.53,4314.13 C37.2@3803.14,4314.13
C51_1: C51.1 SSD1306.28 | length 110.5
  Bottom Layer w10: C51.1@3108.26,4330.62 3108.26,4330.83 3141.73,4364.29 SSD1306.28@3141.73,4427.28
CHRG-: IC2.1 R57.2 | length 42.1
  Bottom Layer w10: R57.2@5463.6,4488.27 5470.06,4494.73 IC2.1@5470.06,4527.73
CS_FLASH: U2.1 U20.24 | length 79.2
  Bottom Layer w10: U2.1@3436.99,3941.05 3438.51,3939.53 U20.24@3515.57,3939.54
CS_OLED: SSD1306.13 U20.36 | length 296.8
  Bottom Layer w10: SSD1306.13@3555.16,4427.27 3555.16,4368.17 3645.49,4277.84 U20.36@3645.49,4167.88
CS_TOUCH1: U20.61 UC1.14 | length 394.2
  Bottom Layer w10: U20.61@3952.57,3860.8 4005.47,3860.79 4133.85,3732.41 4288.38,3732.41 UC1.14@4292.07,3736.09
CS_TOUCH2: U20.14 UC2.14 | length 1364.5
  Bottom Layer w10: UC2.14@2521.36,3215.97 2521.36,3247.97 2533.46,3259.97 2631.86,3259.97 3005.86,3633.97 3576.76,3633.97 3625.76,3682.97 U20.14@3625.8,3730.88
CS_TOUCH3: pad.23 U20.62 UC3.14 | length 2037.5
  Bottom Layer w10: U20.62@3952.57,3841.11 4001.56,3841.07 4055.16,3787.57 4055.16,3718.67 4049.16,3712.77 3964.56,3712.77 3911.36,3659.57 3911.36,3598.57 4324.76,3185.17 4324.76,2939.07 4186.96,2801.27 4186.96,2668.57 4186.96,2649.67 3990.16,2452.87 3990.16,2368.27 4015.96,2342.37 UC3.14@4053.86,2342.37
DB_DRUM: U1.15 U20.16 | length 641.7
  Bottom Layer w10: U1.15@2985.12,3792.23 2989.4,3792.23 3068.86,3712.77 3568.26,3712.77 U20.16@3586.46,3730.87
DB_INSTR: U1.13 U20.20 | length 798
  Bottom Layer w10: U1.13@2985.12,3892.23 2993.7,3892.23 3057.06,3828.87 3057.06,3775.67 3088.57,3744.17 3511.16,3744.17 3562.77,3795.87 3562.77,3850.97 3552.97,3860.87 U20.20@3515.56,3860.87
DB_LOOP: U1.14 U20.15 | length 750.1
  Bottom Layer w10: U1.14@2985.12,3842.23 2994.5,3842.23 3039.36,3797.37 3039.36,3767.87 3078.77,3728.47 3519.67,3728.47 3572.86,3781.57 3592.57,3781.57 3606.16,3767.97 U20.15@3606.16,3730.87
DB_VOL: pad.26 U1.12 U20.17 | length 668.5
  Bottom Layer w10: U1.12@2985.12,3942.23 2996.8,3942.23 pad.26@3058.59,3880.45 ; pad.26@3058.56,3880.47 3074.76,3864.27 3074.76,3781.57 3092.56,3763.87 3477.66,3763.87 U20.17@3515.56,3801.77
DC_OLED: SSD1306.15 U20.34 | length 303.4
  Bottom Layer w10: SSD1306.15@3500.04,4427.27 3499.96,4368.27 3606.12,4262.11 U20.34@3606.12,4167.88
DRUMS_1: DRUMS.1 RN1.4 | length 632.6
  Bottom Layer w5: RN1.4@2581.56,3940.87 2671.26,3851.17 2671.26,3456.77 DRUMS.1@2592.46,3378.07